# Altium PCB Solar Water Heater Controller.PcbDoc
Units mm, origin at the board's own origin, x right, y up, seen from the top; angles counter-clockwise.
Board outline 100 x 100.08 mm, 2 copper layers (Top Layer, Bottom Layer); 88 components, 59 nets, 278 pads, 93 vias.
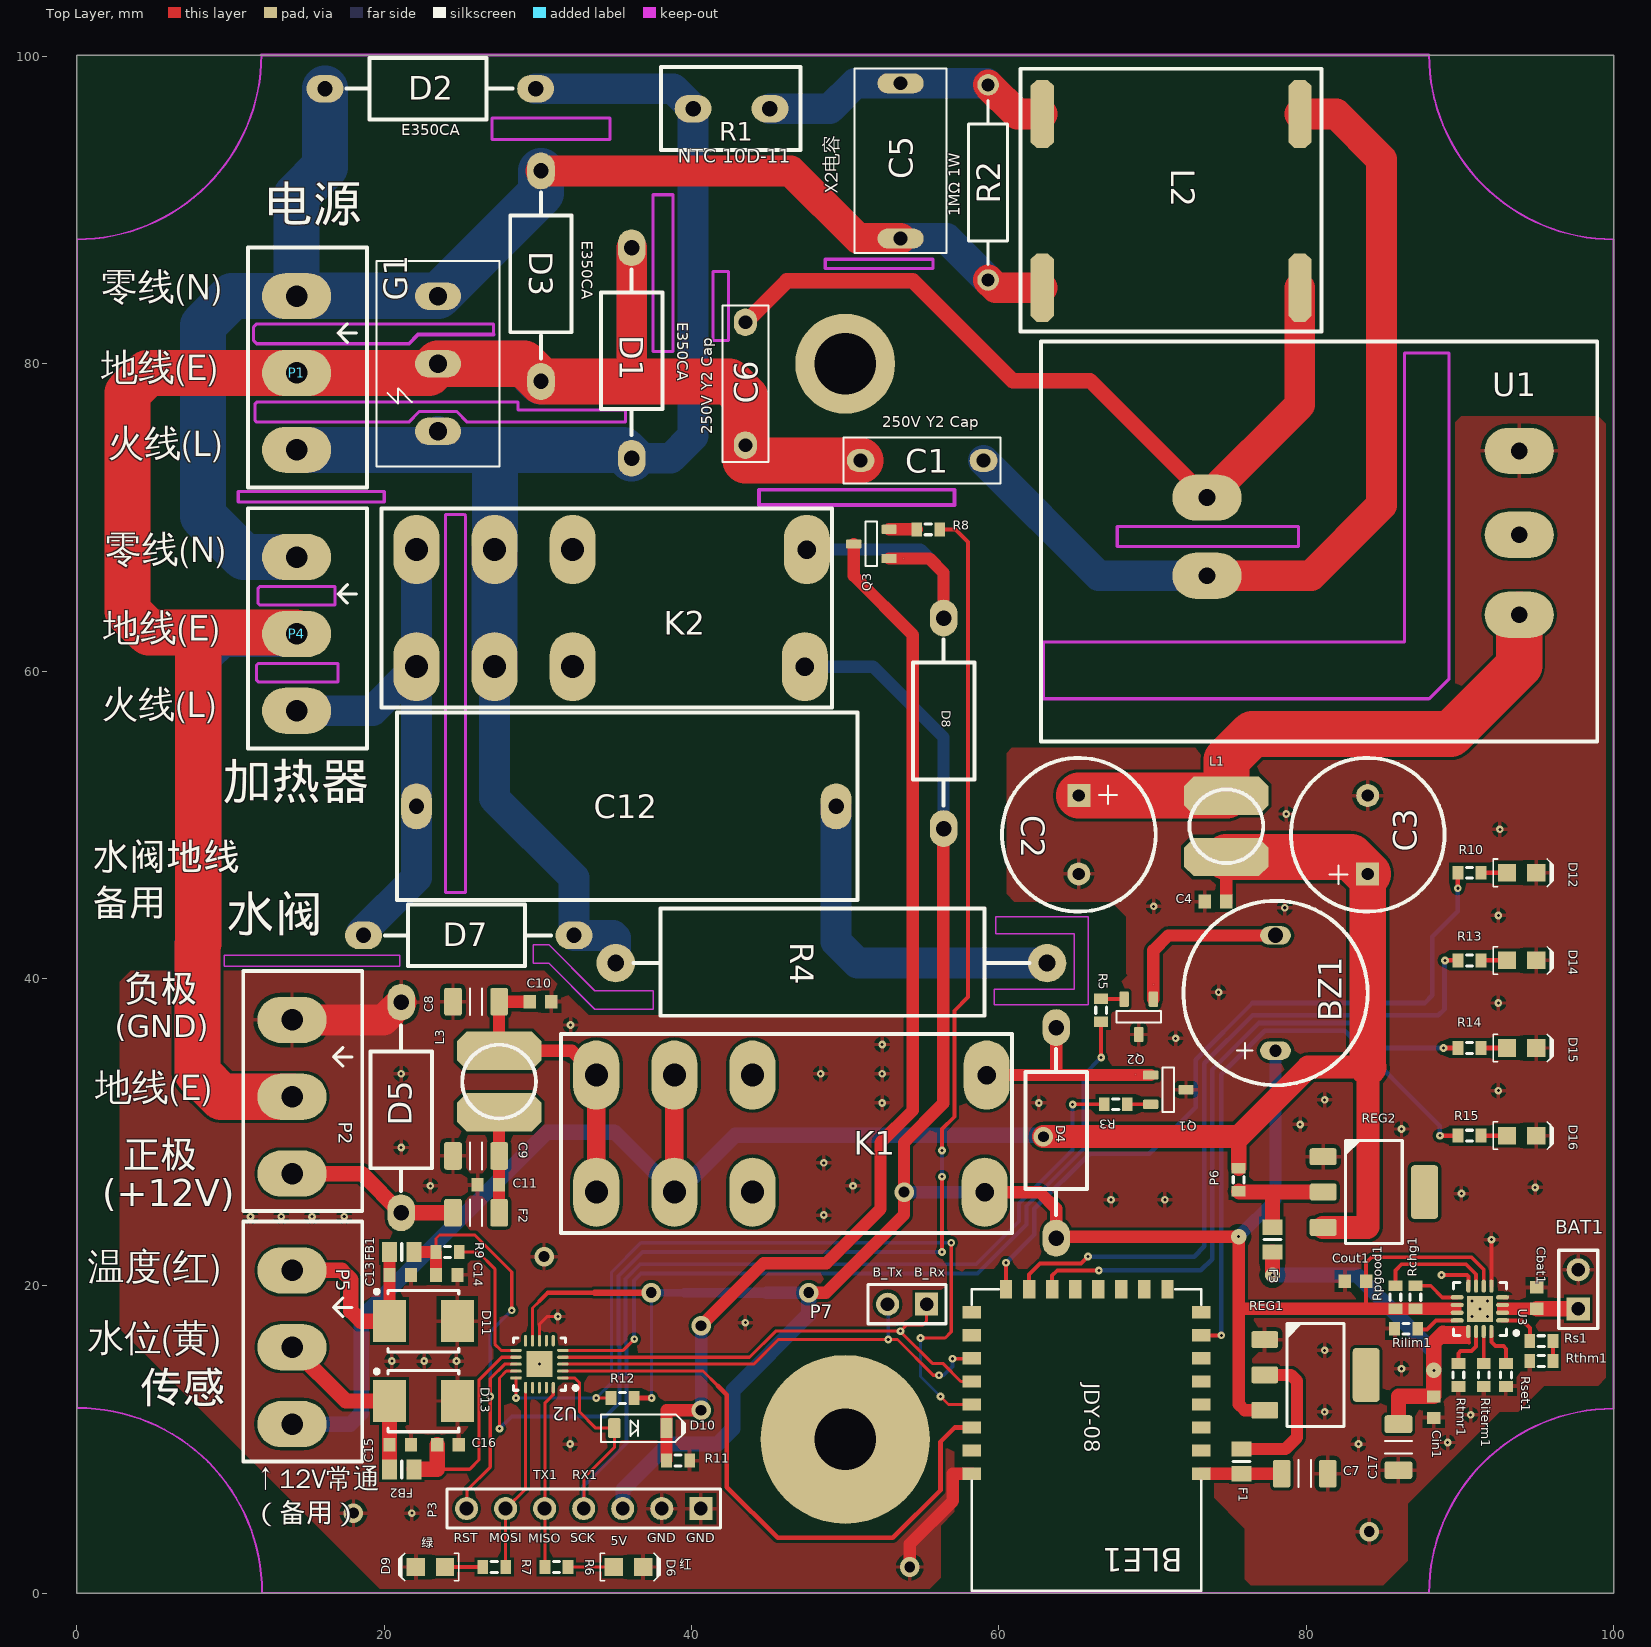
[diagram p0: Top Layer view]
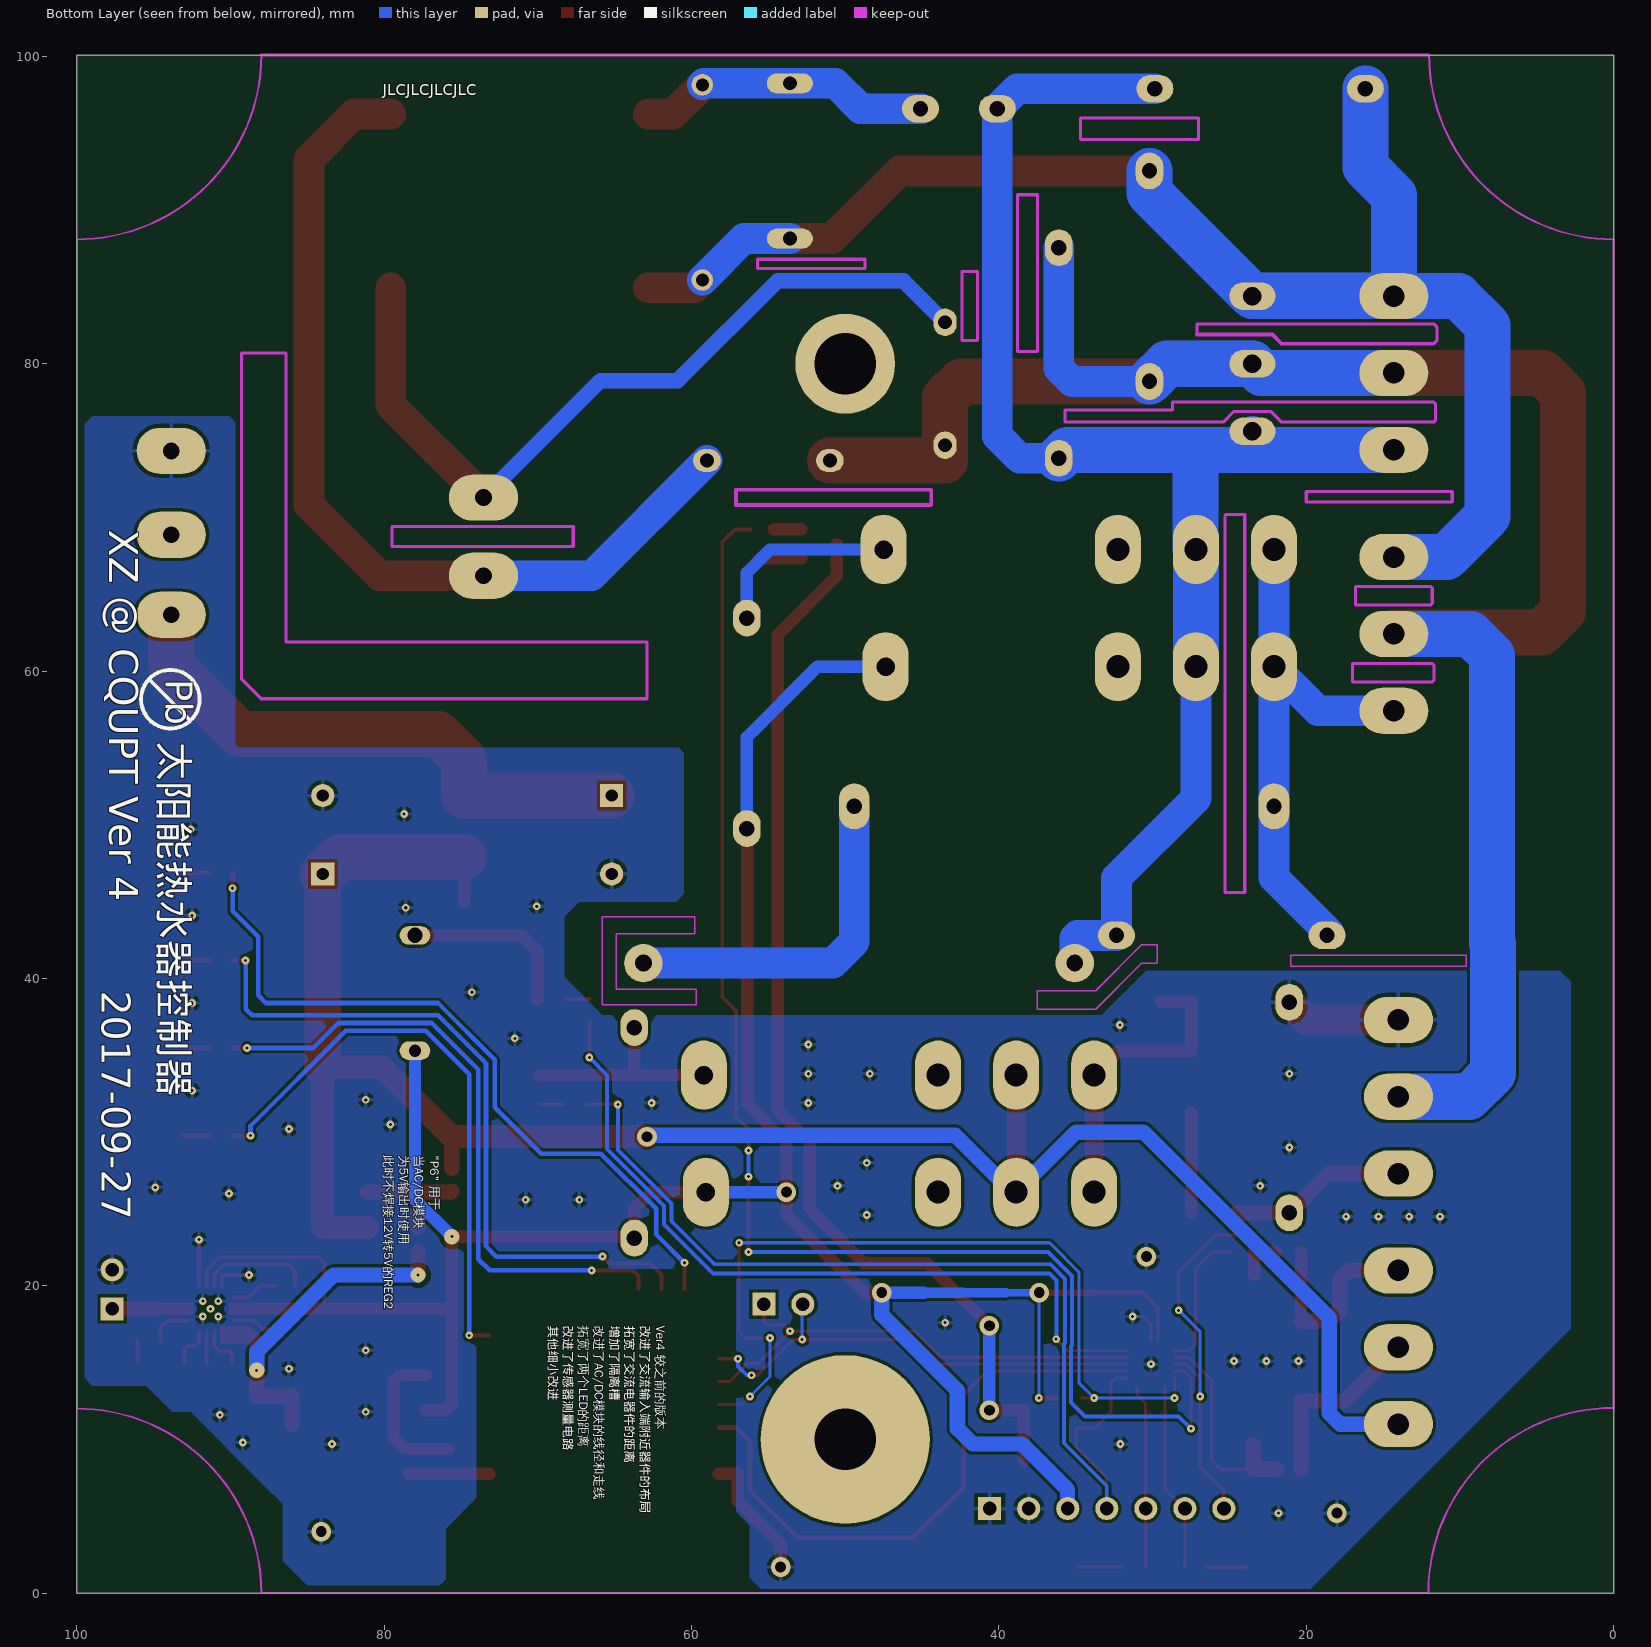
[diagram p1: Bottom Layer view, seen from below]

## Layer stack, top to bottom
Top Solder: solder mask 0.0102, Solder Resist, Dk 3.5
Top Layer: signal copper 0.0356
Dielectric 1: dielectric 0.32, FR-4, Dk 4.8
Bottom Layer: signal copper 0.0356
Bottom Solder: solder mask 0.0102, Solder Resist, Dk 3.5

## Board outline
0,0 100,0 100,100.076 0,100.076

## Design rules (kind name [scope] priority, off if disabled: settings)
Clearance Clearance_1 [All] p1: gap=0.2
Clearance 220V_N_2_GND [InNet('AC220V_N') vs InNet('GND')] p2: gap=0.2 except(1.5: Arc-Poly Track-Poly SMDPad-Poly THPad-Poly Via-Poly)
Clearance 220V_L_2_GND_1 [InNet('NetC12_1') vs InNet('GND')] p3: gap=0.2 except(1.5: Arc-Poly Track-Poly SMDPad-Poly THPad-Poly Via-Poly)
Clearance Earth2GND [InNet('ERTH') vs InNet('GND')] p4: gap=0.2 except(1.5: Track-Poly THPad-Poly)
Clearance [All] p5: gap=0.2
DiffPairsRouting [All] p1: maxlimit=0.254 minlimit=0.254 mostfreqgap=0.254 toplayer_minwidth=0.127 toplayer_maxwidth=0.381 toplayer_prefwidth=0.381 bottomlayer_minwidth=0.127 bottomlayer_maxwidth=0.381 bottomlayer_prefwidth=0.381 maxuncoupledlength=12.7
PolygonConnect [All] p1: connectstyle=Relief reliefconductorwidth=0.254 reliefentries=4 polygonreliefangle="90 Angle" airgapwidth=0.254
RoomDefinition "Solar Water Heater Controller" [InComponentClass('Solar Water Heater Controller')] p1 off: confinementstyle=ConfineIn formatcopy=TRUE lockcomponents=FALSE outline -25.4,-25.4 25.4,-25.4 25.4,0 -25.4,0
RoutingVias [All] p1: holewidth=0.711 width=1.27 viastyle="Through Hole" minholewidth=0.711 minwidth=1.27 maxholewidth=0.711 maxwidth=1.27
SolderMaskExpansion [All] p1: expansion=0.102
Width [All] p1: maxlimit=5 minlimit=0.2 preferedwidth=0.254 minimp=50.000000 maximp=50.000000 favimp=50.000000
29 further rules are at their usual default settings.

## Components (designator, comment, footprint, x,y, rotation, side; value= is the part's Value field where it differs from the comment)
BAT1 "Header 2" HDR1X2 97.7,18.5 r90 top
BLE1 "Bluetooth 4.0" JDY-08 65.7,13.775 r270 top
BZ1 "BUZZER" BUZZER 78,35.3 r90 top
C1 "250V Y2 cap" CAPY2 55,73.7 r0 top
C2 "Cap Pol 25V" CAP680UF 65.2,49.35 r270 top
C3 "Cap Pol 25V" CAP680UF 84,49.35 r90 top
C4 "Cap 50V" 1608[0603] 74.1,45 r0 top
C5 "275V X2 safe cap" CAPX2 53.6,93.2 r270 top
C6 "250V Y2 cap" CAPY2 43.5,78.7 r270 top
C7 "Tantalum Cap 16V" CAPC3216X175N 79.9,7.775 r0 top
C8 "Tantalum Cap 16V" CAPC3216X175N 25.975,38.485 r180 top
C9 "Tantalum Cap 16V" CAPC3216X175N 25.975,28.45 r180 top
C10 "Cap 50V" 1608[0603] 30.175,38.485 r180 top
C11 "Cap 50V" 1608[0603] 26.775,26.575 r0 top
C12 "polyester 1000V" "CBB21 CAPACITOR" 35.752,51.2 r180 top
C13 "Cap Semi" 1608[0603] 21.04,20.7 r0 top
C14 "Cap Semi" 1608[0603] 24.075,20.7 r0 top
C15 "Cap Semi" 1608[0603] 21.04,9.66 r0 top
C16 "Cap Semi" 1608[0603] 24.15,9.66 r0 top
C17 "Tantalum Cap 16V" CAPC3216X175N 86,9.5 r270 top
Cbat1 "GRM219C81A475KE34D" 1608[0603] 95,19.2 r90 top
Cin1 "GRM188R61A105KA61D" 1608[0603] 88.3,12.1 r270 top
Cout1 "GRM21BR61E475MA12L" 1608[0603] 83.2,20.3 r180 top
D1 "P6KE350CA" DO-15 36.1,80.7 r270 top
D2 "P6KE350CA" DO-15 23,97.9 r0 top
D3 "P6KE350CA" DO-15 30.2,85.7 r270 top
D4 "Diode FR207 1000V 70A" DO-15 63.725,29.95 r270 top
D5 "P6KE15A" DO-15 21.1,31.6 r90 top
D6 "LED1" LED_1420 35.9,1.7 r270 top
D7 "P6KE350CA" DO-15 25.5,42.8 r0 top
D8 "Diode FR207 1000V 70A" DO-15 56.4,56.6 r270 top
D9 "LED2" LED_1420 23,1.7 r90 top
D10 "LL60P" LL60P 36.675,10.735 r0 top
D11 "P6KE6.8A" ONSC-SMB-2-403A-03_H_V 22.55,17.7 r0 top
D12 "LEDW" LED_1420 94.018,46.873 r270 top
D13 "P6KE6.8A" ONSC-SMB-2-403A-03_H_V 22.55,12.5 r0 top
D14 "LEDW" LED_1420 94.018,41.173 r270 top
D15 "LEDW" LED_1420 94.018,35.473 r270 top
D16 "LEDW" LED_1420 94.018,29.773 r270 top
F1 "Fuse 1A" 6-0805_L 75.8,8.575 r270 top
F2 "Fuse 13.2V/0.5A" CAPC3216X100N 25.975,24.75 r0 top
F3 "Fuse 1A" 6-0805_L 77.8,23 r270 top
FB1 "FB" 6-0805_L 21.14,22.2 r0 top
FB2 "FB" 6-0805_L 21.14,8.06 r0 top
G1 "放电管" "GAS TUBE" 23.5,80 r90 top
K1 "5VRelay-AC-220V_15A" SZ-S105LM 46.5,29.9 r180 top
K2 "5VRelay-AC-220V_15A" SZ-S105LM 34.8,64.1 r180 top
L1 "LDM" CD54 74.8,49.9 r0 top
L2 "INDUCTOR LCM" "SUMIDA CPFC1709/MS" 71.2,90.6 r270 top
L3 "Inductor Iron Dot" CD54 27.475,33.285 r0 top
P1 "AC In" "3P 5.08MM CONNECTER" 14.3,79.4 r270 top
P2 "Valve Plug" "3P 5.08MM CONNECTER" 14,32.3 r270 top
P3 "Header 7" HDR1X7 40.6,5.5 r180 top
P4 "Heater Plug" "3P 5.08MM CONNECTER" 14.3,62.42 r270 top
P5 "Sens" "3P 5.08MM CONNECTER" 14,16 r270 top
P6 "PowerSelect" J1-0603#1 75.6,26.9 r270 top
P7 "Serial" HDR1X2 55.3,18.8 r180 top
Q1 "NPN" SOT23-3 71.025,32.76 r0 top
Q2 "NPN" SOT23-3 69.1,37.5 r270 top
Q3 "NPN" SOT23-3 51.7,68.275 r180 top
R1 "NTC 10D-11" "NTC 10D-11" 45.1,96.6 r180 top
R2 "1W" AXIAL-0.5 59.3,91.8 r90 top
R3 "0603" J1-0603#2 67.6,31.81 r180 top
R4 "cement 10W" "5W RESISTOR" 49.1,41 r0 top
R5 "0603" J1-0603#1 66.65,37.925 r270 top
R6 "0603" J1-0603#1 31.205,1.7 r0 top
R7 "0603" J1-0603#1 27.165,1.7 r180 top
R8 "0603" J1-0603#1 55.4,69.225 r0 top
R9 "0603" J1-0603#1 24.125,22.2 r180 top
R10 "0603" J1-0603#1 90.618,46.873 r0 top
R11 "0603" J1-0603#1 39.125,8.625 r180 top
R12 "0603" J1-0603#1 35.5,12.7 r0 top
R13 "0603" J1-0603#1 90.618,41.173 r0 top
R14 "0603" J1-0603#1 90.618,35.473 r0 top
R15 "0603" J1-0603#1 90.618,29.773 r0 top
Rchg1 "CRCW04021K50FKED" J1-0603#1 87.1,19.25 r90 top
REG1 "5V Regulator" SOT223 80.6,14.2 r0 top
REG2 "5V Regulator" SOT223 84.4,26.1 r0 top
Rilim1 "CRCW04023K09FKED" J1-0603#1 86.5,17.2 r180 top
Riterm1 "CRCW04021K43FKED" J1-0603#1 91.55,14.2 r270 top
Rpgood1 "CRCW04021K50FKED" J1-0603#1 85.8,19.25 r90 top
Rs1 "ERJ-2BSFR10X" J1-0603#1 95.3,16.4 r0 top
Rset1 "CRCW04021K74FKED" J1-0603#1 93,14.2 r270 top
Rthm1 "NCP15XH103E03RC" J1-0603#1 95.3,15.1 r0 top
Rtmr1 "CRCW040256K2FKED" J1-0603#1 89.9,14.2 r270 top
U1 "AC/DC Module" HB12N10-2836 83.7,69 r0 top
U2 "ATtiny441-MMHR" 20M2_N 30.1,14.9 r180 top
U3 "BQ24232RGTR" RGT16-1700X1700TP 91.3,18.5 r180 top

## Footprints (in the part's own frame and the unit in brackets; to place one, negate y for a bottom-side part, rotate by r counter-clockwise, add the part's x,y. Pads: shape width x height; smd on the part's side, far side on the other; paste and mask are expansions set on the pad)
"3P 5.08MM CONNECTER" [mm]
  oval 3x4.5 hole 1.4: 1(-5,0) 2(0,0) 3(5,0)
  silkscreen extent -8.18,-3.18 7.45,4.57, body extent -8.05,-3.05 7.32,4.45, height 7
"5W RESISTOR" [mm]
  round 2.5 hole 1.1: 1(-14.034,0) 2(14.034,0)
  silkscreen extent -12.89,-3.43 12.89,3.56, body extent -10.99,-3.3 9.84,3.43, height 7
6-0805_L [mm] "Chip Resistor, Body 2.0x1.2mm, IPC High Density"
  rect 1x1.3 smd: 1(-0.8,0) 2(0.8,0)
  silkscreen extent 0,-0.55 0,0.55, body extent -1.07,-0.7 1.07,0.7, height 0.7
20M2_N [mm] "QFN, 20-Leads, Body 3x3mm, Pitch 0.45mm, Thermal Pad 1.7x1.7mm, IPC Medium Density"
  oval 0.75x0.2 smd: 1(-1.525,0.9) 2(-1.525,0.45) 3(-1.525,0) 4(-1.525,-0.45) 5(-1.525,-0.9) 11(1.525,-0.9) 12(1.525,-0.45) 13(1.525,0) 14(1.525,0.45) 15(1.525,0.9)
  oval 0.2x0.75 smd: 6(-0.9,-1.525) 7(-0.45,-1.525) 8(0,-1.525) 9(0.45,-1.525) 10(0.9,-1.525) 16(0.9,1.525) 17(0.45,1.525) 18(0,1.525) 19(-0.45,1.525) 20(-0.9,1.525)
  rect 1.7x1.7 smd: 21(0,0)
  silkscreen extent -2.47,-1.7 1.7,1.7, body extent -1.55,-1.55 1.55,1.55, height 0.85
1608[0603] [mm] "Chip Capacitor, Body 1.6x0.8mm, IPC High Density"
  rect 0.8x0.9 smd: 1(-0.7,0) 2(0.7,0)
  body extent -0.87,-0.48 0.87,0.48, height 1.3
AXIAL-0.5 [mm] "Axial Device, Thru-Hole; 2 Leads; 0.5 in Pin Spacing"
  round 1.4 hole 0.85: 1(-6.35,0) 2(6.35,0)
  silkscreen extent -5.33,-1.27 5.33,1.27
BUZZER [mm]
  oval 1.2x2 hole 0.8: 1(0,0)
  oval 1.2x2 hole 1: 2(7.5,0)
  silkscreen extent -2.25,-6 9.75,6
CAP680UF [mm] "680uF 25V"
  rect 1.5x1.5 hole 0.8: 1(-2.55,0)
  round 1.5 hole 0.8: 2(2.55,0)
  silkscreen extent -5,-5 5,5
CAPC3216X100N [mm] "Chip Capacitor, Body 3.2x1.6mm, 1.0mm H, EIA 1206, IPC Medium Density"
  round 0.508 on Mech15: 0(0,0)
  rrect25% 1.15x1.8 smd: 1(-1.5,0) 2(1.5,0)
  silkscreen extent -0.4,-0.88 0.4,0.88, body extent -1.7,-0.9 1.7,0.9, height 1
CAPC3216X175N [mm] "Chip Capacitor, Body 3.2x1.6mm, 1.75mm H, EIA 1206, IPC Medium Density"
  round 0.508 on Mech15: 0(0,0)
  rrect25% 1.15x1.8 smd: 1(-1.5,0) 2(1.5,0)
  silkscreen extent -0.4,-0.88 0.4,0.88, body extent -1.7,-0.9 1.7,0.9, height 1.75
CAPX2 [mm]
  oval 1.3x3 hole 0.9: 1(-5.05,0) 2(5.05,0)
  silkscreen extent -6,-3 6,3, body extent -6,-3 6,3, height 12
CAPY2 [mm]
  oval 1.8x1.5 hole 0.9: 1(-4,0) 2(4,0)
  silkscreen extent -5.1,-1.5 5.1,1.5
"CBB21 CAPACITOR" [mm] "105J/1000V 1UF 5%"
  oval 2x3 hole 1: 1(-13.652,0) 2(13.652,0)
  silkscreen extent -15.05,-6.1 14.92,6.1, body extent -14.92,-5.97 14.8,5.97, height 20.6
CD54 [mm]
  oct 5.5x2.5 smd: 1(0,2) 2(0,-2)
  silkscreen extent -2.4,-2.4 2.4,2.4
DO-15 [mm] "TVS Tube"
  oval 2.4x1.8 hole 1: 1(-6.85,0) 2(6.85,0)
  silkscreen extent -5.45,-2 5.35,2
"GAS TUBE" [mm]
  oval 1.8x3 hole 1.2: 1(-4.4,0) 2(0,0) 3(4.4,0)
  silkscreen extent -6.7,-4 6.7,4
HB12N10-2836 [mm] "220V AC to 12VDC 1A"
  oval 4.5x3 hole 1.1: 1(-10.16,-2.794) 2(-10.16,2.286) 3(10.16,-5.334) 4(10.16,-0.127) 5(10.16,5.334)
  silkscreen extent -20.95,-13.59 15.24,12.45, body extent -21.08,-13.59 15.11,12.45, height 16
HDR1X2 [mm] "Connector; Header; 2 Position"
  rect 1.5x1.5 hole 0.9: 1(0,0)
  round 1.5 hole 0.9: 2(2.54,0)
  silkscreen extent -1.27,-1.27 3.81,1.27
HDR1X7 [mm] "Connector; Header; 7 Position"
  rect 1.5x1.5 hole 0.9: 1(0,0)
  round 1.5 hole 0.9: 2(2.54,0) 3(5.08,0) 4(7.62,0) 5(10.16,0) 6(12.7,0) 7(15.24,0)
  silkscreen extent -1.27,-1.27 16.51,1.27
J1-0603#1 [mm] "Chip Resistor, Body 1.6x0.8mm, IPC High Density"
  rect 0.7x0.9 smd: 1(-0.75,0) 2(0.75,0)
  silkscreen extent -0.2,-0.35 0.2,0.35, body extent -0.85,-0.48 0.85,0.48, height 0.9
J1-0603#2 [mm] "Chip Resistor, Body 1.6x0.8mm, IPC High Density"
  rect 0.7x0.9 smd: 1(-0.75,0)
  rect 0.7x0.9 smd paste+0: 2(0.75,0)
  silkscreen extent -0.2,-0.35 0.2,0.35, body extent -0.85,-0.48 0.85,0.48, height 0.9
JDY-08 [mm]
  rect 0.8x1.2 smd: 1(6,7.468) 2(4.5,7.468) 3(3,7.468) 4(1.5,7.468) 5(0,7.468) 6(-1.5,7.468) 7(-3,7.468) 8(-4.5,7.468) 17(-4.5,-7.468) 18(-3,-7.468) 19(-1.5,-7.468) 20(0,-7.468) 21(1.5,-7.468) 22(3,-7.468) 23(4.5,-7.468) 24(6,-7.468)
  rect 1.2x0.8 smd: 9(-6,5.265) 10(-6,3.765) 11(-6,2.265) 12(-6,0.765) 13(-6,-0.735) 14(-6,-2.235) 15(-6,-3.735) 16(-6,-5.235)
  silkscreen extent -6,-7.47 13.61,7.47, body extent -5.94,-7.39 13.49,7.34, height 7
LED_1420 [mm] "LED used in 1420"
  rect 1.14x1.2 smd: 1(0,-0.955) 2(0,0.955)
  silkscreen extent -0.9,-1.84 0.9,2.06
LL60P [mm] "1N60P"
  rrect25% 0.8x1.3 smd: 1(-1.7,0) 2(1.7,0)
  Top Layer pour cut-out: -1.708,0.716 1.7,0.716 1.7,-0.8 -1.708,-0.8
  silkscreen extent -2.56,-0.9 2.9,0.9, body extent -2,-0.8 2.05,0.7, height 0.8
"NTC 10D-11" [mm] "NTC 10D-11"
  oval 2.4x1.8 hole 1: 1(0,0) 2(5,0)
  silkscreen extent -2,-2.7 7.1,2.7
ONSC-SMB-2-403A-03_H_V [mm] "Molded, 2-Leads, Body 4.6x3.95mm"
  rect 2.159x2.743 smd: 1(-2.21,0) 2(2.21,0)
  silkscreen extent -3.16,-2 2.3,2.05, body extent -2.3,-1.97 2.3,1.97, height 2.42
RGT16-1700X1700TP [mm] "QFN, 16-Leads, Body 3x3mm, Pitch 0.5mm, Thermal Pad 1.7x1.7mm, TI Recommended"
  oval 0.85x0.28 smd paste-0.025 mask+0.07: 1(-1.475,0.75) 2(-1.475,0.25) 3(-1.475,-0.25) 4(-1.475,-0.75) 9(1.475,-0.75) 10(1.475,-0.25) 11(1.475,0.25) 12(1.475,0.75)
  oval 0.28x0.85 smd paste-0.025 mask+0.07: 5(-0.75,-1.475) 6(-0.25,-1.475) 7(0.25,-1.475) 8(0.75,-1.475) 13(0.75,1.475) 14(0.25,1.475) 15(-0.25,1.475) 16(-0.75,1.475)
  rect 1.7x1.7 smd paste-0.85 mask+0.07: 17(0,0)
  silkscreen extent -2.5,-1.73 1.73,1.73, body extent -1.57,-1.57 1.58,1.58, height 1
SOT23-3 [mm] "SOT23, 3 pin"
  round 0.5 on Mech15: 0(0,0)
  rrect25% 1x0.6 smd: 1(-1.15,0.95) 2(-1.15,-0.95) 3(1.15,0)
  silkscreen extent -0.38,-1.45 0.38,1.45, body extent -1.4,-1.45 1.4,1.45, height 1.29
SOT223 [mm] "SOT223 /SC-73"
  round 1 on Mech15: 0(0,0)
  rrect25% 1.75x1.1 smd: 1(-3.3,2.3) 2(-3.3,0) 3(-3.3,-2.3)
  rrect25% 1.75x3.5 smd: 4(3.3,0)
  silkscreen extent -1.85,-3.35 1.85,3.35, body extent -3.65,-3.35 3.65,3.35, height 1.8
"SUMIDA CPFC1709/MS" [mm]
  oct 4.45x1.5 smd: 1(-5.65,-8.38) 2(5.65,-8.38) 3(5.65,8.38) 4(-5.65,8.38)
  silkscreen extent -8.6,-9.8 8.5,9.8, body extent -8.7,-9.9 8.6,10, height 9.91
SZ-S105LM [mm] "5V control 250V AC 16A"
  oval 3x4.5 hole 1.5: 1(7.62,-3.81) 1(7.62,3.81) 2(12.7,-3.81) 2(12.7,3.81) 5(2.54,3.81) 5(2.54,-3.81)
  oval 3x4.5 hole 1.2: 3(-12.573,3.81) 4(-12.7,-3.81)
  silkscreen extent -14.35,-6.48 14.99,6.48, body extent -14.22,-6.35 14.86,6.35, height 20.6

## Part data
BAT1: "Header, 2-Pin"
BLE1: library part CC2541-Small
BZ1: "5V有源蜂鸣器 电磁式 SOT塑封管 5V 12mm"
C1 C6: library part "Cap Semi", "JNC222M 250V"
C2 C3: library part "Cap Pol1", "Polarized Capacitor (Radial)"
C4 C10 C11 C12: library part "Cap Semi", "Capacitor (Semiconductor SIM Model)"
C5: library part "Cap Semi", "MPX104KV 275V X2安规电容"
C7 C17: library part "Cap Pol3", "22UF 16V 226K A3216 1206"
C8 C9: library part "Cap Pol3"
C13 C14 C15 C16: "Capacitor (Semiconductor SIM Model)"
Cbat1: "GRM219C81A475KE3"
Cin1: "GRM188R61A105KA6"
Cout1: "GRM21BR61E475MA1"
D1 D2 D3 D7: library part "Diode TVS"
D4 D8: library part "Diode 1N914", "High Conductance Fast Diode"
D5 D11: library part "Diode TVS_S"
D6 D12 D14 D15 D16: library part LED2, "Typical RED, GREEN, YELLOW, AMBER GaAs LED"
D9: "Typical RED, GREEN, YELLOW, AMBER GaAs LED"
D10: library part "Diode 1N914"
D13: library part "Diode TVS_S", "P6KE6.8A SMB"
F1 F3: library part "Fuse 2", "Fuse 1000mA 6V"
F2: library part "Fuse 2", "1206SMD 500mA 13.2V/0.5A"
FB1 FB2: library part Res2, "磁珠"
G1: library part GOT, "3RM230L-8 230V"
K1 K2: library part Relay-SPST, "Single-Pole Single-Throw Relay SZ-S-105LM"
L1: library part "INDUCTOR IRON", "4R7H 贴片电感"
L3: "贴片 CD54 100uH"
P1 P2 P4 P5: library part "Header 3", "Header, 3-Pin"
P3: "Header, 7-Pin"
P6 P7: library part "Header 2", "Header, 2-Pin"
Q1 Q2 Q3: "NPN Bipolar Transistor"
R1 R2: library part "Res Semi", "Semiconductor Resistor"
R3 R4 R5 R6 R7 R8 R9 R10 R11 R12 R13 R14 R15: library part Res3, "Resistor"
REG1 REG2: library part AMS1117
U1: library part "AC/DC Moule", "AC/DC Module 220V AC / 12V DC 1A"
U2: library part ATtiny44A-MMHR, "8-bit AVR Microcontroller,  20MHz, 1.8-5.5V, 4KB Flash, 256 Bytes EEPROM, 256 Bytes SRAM, 20-pin VQFN, Industrial Grade (-40癈 to 85癈), Pb-Free, Reel"

## Free pads (board coordinates)
  round 11 hole 4: ""(50,10)
  round 6.5 hole 4: ""(50,80)

## Via types
v1: diameter 0.5, hole 0.2, Top Layer to Bottom Layer, 75 vias
v2: diameter 1.27, hole 0.711, Top Layer to Bottom Layer, 10 vias
v3: diameter 0.5, hole 0.2, Top Layer to Bottom Layer, tented top, 5 vias
v4: diameter 1, hole 0.2, Top Layer to Bottom Layer, 3 vias

## Nets (pads, with @x,y where several pads share a name; then routed paths per layer and width w, separated by ;. In a path a pad name is that pad's centre, name@x,y a point inside that pad or via, vN(x,y) a via of type N, cw(c..) or ccw(c..) an arc to the next point about the centre after c; other vN are vias at no path point)
+3V3: BLE1.1 C7.1 F1.2 | length 5.3
  Top Layer w0.8: BLE1.1@73.168,7.734 BLE1.1 F1.2 C7.1
+5: BZ1.1 Cout1.1 D4.2 D8.2 K1.3 K2.3 P3.3 R12.2 Rchg1.1 REG1.3 Rpgood1.1 U2.9 U3.6 U3.10 U3.11 | length 176
  Top Layer w0.2: U2.9 29.65,18.55 30.1,19
  Top Layer w0.254: 30.1,19 30.65,19.55 ; 83.9,18.5 Cout1.1 83.9,21.5 84.254,21.854 90.746,21.854 91.55,21.05 U3.6
  Top Layer w0.3: 30.65,19.55 33.7,19.55 ; R12.2 v1(37.4,12.7)
  Top Layer w0.4: 33.7,19.55 v2(37.375,19.55)
  Top Layer w0.8: v2@47.725,19.55 48.75,19.55 53.825,24.625 v2(53.825,26.09) 53.825,29.309 56.373,31.857 56.373,49.75 D8.2 ; K1.3 62.66,26.09 63.725,25.025 D4.2@63.725,23.15 ; D4.2@63.775,23.2 v4(75.6,23.2) 75.6,18.5 ; REG1.3 76,11.9 75.6,12.3 75.6,18.5 ; 88.6,18.5 Rchg1.1 Rpgood1.1 83.9,18.5 75.6,18.5
  Top Layer w1: D4.2@63.725,23.15 D4.2@63.775,23.2
  Bottom Layer w0.2: v1(37.4,12.7) v2@37.4,19.525
  Bottom Layer w0.3: v2(37.375,19.55) v2@37.4,19.525
  Bottom Layer w0.5: v2(37.375,19.55) 39.525,19.55
  Bottom Layer w0.6: 39.525,19.55 42.3,19.55
  Bottom Layer w0.7: 42.3,19.55 44.875,19.55
  Bottom Layer w0.8: 44.875,19.55 v2(47.625,19.55) v2@47.725,19.55 ; K2.3 51.81,60.29 56.4,55.7 D8.2 ; v2(53.825,26.09) K1.3 ; v4(75.6,23.2) 78,25.6 BZ1.1
  Bottom Layer w1: P3.3@35.535,5.5 35.535,6.735 38.5,9.7 41.7,9.7 42.7,10.7 42.7,13.2 47.625,18.125 v2(47.625,19.55)
+12: C3.1 C4.2 K1.1 L1.2 P5.3 P6.1 REG2.3 | length 134.7
  Top Layer w0.8: C4.2 L1.2
  Top Layer w1: P6.1 75.6,29.7
  Top Layer w1.2: K1.1@38.88,26.09 K1.1@38.88,33.71
  Top Layer w1.5: v2(62.9,29.7) 75.6,29.7 80.125,34.225 84.025,34.225 84.025,23.825 ; REG2.3 84,23.8
  Top Layer w2.4: C3.1 84,34.25 84.025,34.225
  Top Layer w3: L1.2 82.9,47.9 C3.1
  Bottom Layer w0.8: K1.1@38.88,26.09 K1.1@39.14,26.09
  Bottom Layer w1: P5.3 17.8,11 18.5,11.7 18.5,17.9 30.6,30 34.97,30 K1.1@38.88,26.09 ; K1.1@39.14,26.09 42.85,29.8 62.8,29.8 v2(62.9,29.7)
AC220V_L: D1.2 D2.2 D7.2 G1.1 K2.1 P1.3 R1.2 R4.1 | length 98.1
  Bottom Layer w2: 23.5,74.4 G1.1 ; K2.1@27.18,60.29 27.18,51.72 32.35,46.55 D7.2 34.9,42.8 35.067,42.633 R4.1 ; D2.2 38.8,97.9 R1.2 40.1,75.3 38.65,73.85 D1.2
  Bottom Layer w3: P1.3 23.5,74.4 27.2,74.4 ; K2.1@27.18,60.29 27.18,67.91 27.2,67.93 27.2,74.4 ; D1.2 35.55,74.4 27.2,74.4
AC220V_N: C5.2 D2.1 D3.1 G1.3 L2.2 P1.1 P4.1 R2.1 | length 96.7
  Top Layer w2: D3.1 46.45,92.55 50.85,88.15 C5.2 ; R2.1 59.8,84.95 L2.2
  Bottom Layer w2: C5.2 56.6,88.15 R2.1
  Bottom Layer w3: P4.1 10.88,67.42 8.2,70.1 8.2,82.5 10.1,84.4 P1.1 P1.1@14.3,84.427 ; D2.1 16.15,92.8 14.3,90.95 P1.1@14.3,84.427 ; G1.3 30.2,91.1 D3.1 ; G1.3@23.5,84.427 P1.1@14.3,84.427
ARD_MISO/LED1: P3.5 R6.1 U2.20 | length 11.9
  Top Layer w0.2: R6.1 30.455,12.355 31,12.9 U2.20
ARD_MOSI/LED2: P3.6 R7.1 U2.16 | length 12.2
  Top Layer w0.2: R7.1@27.9,1.715 P3.6 ; P3.6@27.915,5.485 29.2,6.77 U2.16
ARD_RST/SENS_ADC: C14.1 FB1.2 P3.7 R9.2 U2.13 | length 29.7
  Top Layer w0.2: R9.2 23.375,23.075 23.6,23.3 25.9,23.3 28.3,20.9 v1(28.3,18.4) ; P3.7@25.375,5.5 25.375,6.675 26.9,8.2 v1(26.9,12.8) 26.9,13.966 27.834,14.9 U2.13
  Top Layer w0.8: FB1.2 R9.2 C14.1
  Bottom Layer w0.2: v1(26.9,12.8) 26.9,17 v1(28.3,18.4)
ARD_SCK/PUMP: D10.1 P3.4 R3.2 U2.1 | length 66.2
  Top Layer w0.2: U2.1 32.4,14 32.706,13.694 32.706,11.794 33.765,10.735 D10.1 34.975,9.475 33,7.5 P3.4@33,5.5
  Top Layer w0.254: v1(64.8,31.8) R3.2
  Bottom Layer w0.254: P3.4 32.98,6.98 35.754,9.754 35.754,16.23 35.698,16.286 35.698,20.452 36.646,21.4 58.5,21.4 61.3,24.2 61.3,25.342 64.8,28.842 v1(64.8,31.8)
ARD_VOLTSENS: BLE1.21 R12.1 U2.15 | length 53.4
  Top Layer w0.2: v1(28.575,12.7) U2.15 ; v1(33.8,12.7) R12.1@34.65,12.7 ; v1(54.9,16.6) 56.5,16.6 56.9,17 v1(56.9,22.8) ; v1(56.2,12.8) 56.725,12.275 BLE1.21
  Bottom Layer w0.2: v1(28.575,12.7) v1(33.8,12.7) 34.8,13.7 34.8,20.9 36.7,22.8 v1(56.9,22.8) ; v1(54.9,16.6) 54.9,14.1 v1(56.2,12.8)
BLE_RXD: BLE1.20 P7.1 U2.4 | length 31.8
  Top Layer w0.2: U2.4 43.775,15.35 45.475,17.05 v1(53.6,17.05) ; P7.1 55.3,17.7 55.059,17.459 54.009,17.459 v1(53.6,17.05) ; BLE1.20 57.525,13.775 56.35,14.95 55.668,14.95 53.6,17.018 v1(53.6,17.05)
BLE_TXD: BLE1.19 P7.2 U2.3 | length 31.3
  Top Layer w0.2: U2.3 44.043,14.9 45.643,16.5 v1(52.8,16.5) 53.4,16.5 55.724,14.176 v1(56.103,14.176)
  Top Layer w0.254: v1(56.975,15.25) 58.207,15.25 BLE1.19
  Bottom Layer w0.2: P7.2 52.8,18.76 v1(52.8,16.5)
  Bottom Layer w0.254: v1(56.103,14.176) 56.401,14.176 56.975,14.75 v1(56.975,15.25)
BLT_PWRC: BLE1.22 U2.2 | length 39.4
  Top Layer w0.2: U2.2 40.75,14.45 41.7,13.5
  Top Layer w0.3: 41.7,13.5 42.3,12.9 42.3,6.9 45.6,3.6 53.1,3.6 56.2,6.7 56.2,9.846 57.129,10.775 BLE1.22
BUZZER: R5.2 U2.5 | length 51
  Top Layer w0.2: U2.5 35.55,15.8 v1(36.275,16.525)
  Top Layer w0.254: v1(66.65,34.85) R5.2
  Bottom Layer w0.254: v1(36.275,16.525) 36.25,16.55 36.25,20.35 36.7,20.8 58.6,20.8 61.8,24 61.8,25.2 65.5,28.9 65.5,33.7 v1(66.65,34.85)
ERTH: C1.1 C6.2 D1.1 D3.2 G1.2 P1.2 P2.2 P4.2 | length 195.2
  Top Layer w2: 36.1,78.85 D1.1
  Top Layer w2.5: P4.2@14.22,62.5 P4.2
  Top Layer w3: P2.2 9.4,32.3 7.85,33.85 7.85,42.225 7.9,42.275 7.9,62.5 ; P4.2@14.22,62.5 7.9,62.5 ; C1.1 43.5,73.7 43.5,77.8 42.45,78.85 36.1,78.85 30.25,78.85 29.1,80 G1.2 22.9,79.4 P1.2 4.6,79.4 3.3,78.1 3.3,63.9 4.7,62.5 7.9,62.5
  Bottom Layer w2: D3.2 35.25,78.85 36.1,79.7 D1.1
  Bottom Layer w3: P2.2 9.4,32.3 7.85,33.85 7.85,42.275 7.9,42.325 7.9,61 9.32,62.42 P4.2 ; P1.2 22.9,79.4 G1.2 29.05,80 D3.2
GND: BAT1.2 BLE1.24 C2.2 C3.2 C4.1 C7.2 C8.2 C9.2 C10.1 C11.1 C13.2 C14.2 C15.2 C16.2 C17.2 Cbat1.2 Cin1.2 Cout1.2 D5.2 D6.2 D9.2 D11.2 D12.2 D13.2 D14.2 D15.2 D16.2 P2.1 P3.1 P3.2 Q1.3 Q2.3 R11.1 REG1.1 REG2.1 Rilim1.2 Riterm1.2 Rset1.2 Rthm1.1 Rtmr1.2 U1.5 U2.8 U2.21 U3.4 U3.5 U3.8 U3.17 | length 24
  Top Layer w0.2: U2.8 30.1,17.5 30.6,18 v1(31.3,18)
  Top Layer w0.254: v1(88.8,20.7) 90.458,20.7 90.55,20.608 U3.8 ; U3.5 v1(92.05,23)
  Top Layer w0.8: v2(54.2,1.7) 54.2,3.2 57.002,6.002 57.002,7.775 BLE1.24
  Top Layer w2: P2.1 19.95,37.3 D5.2
  other v1: 21.8,5.2 32.1,9.7 83.4,9.7 89.2,9.8 90.7,11.6 81.2,11.8 86.2,14.6 30.1,14.9 20.5,15.1 22.6,15.1 24.7,15.1 81.2,15.8 43.5,17.6 11.3,24.5 13.3,24.5 15.3,24.5 17.4,24.5 48.6,24.6 67.3,25.6 70.8,25.6 90.1,26 94.9,26.4 23,26.5 50.5,26.5 48.6,28 21.1,29 86.2,30.2 79.6,30.5 52.4,31.9 62.6,31.9 81.2,32.1 92.5,32.7 21.1,33.8 48.4,33.8 52.4,33.8 52.4,35.7 71.5,36.1 32.127,36.973 92.5,38.4 74.3,39.1 92.5,44.1 78.6,44.6 70.073,44.689 92.6,49.7 78.7,50.7
  other v2: 84.1,4 18,5.2 30.4,21.9
  other v3: 90.8,18 91.8,18 91.3,18.5 90.8,19 91.8,19
HEATER_L: C12.2 D7.1 K2.2 P4.3 | length 35.4
  Bottom Layer w2: P4.3 19.23,57.42 K2.2@22.047,60.237 ; D7.1@18.5,42.95 22.1,46.55 22.1,60.29 K2.2@22.1,67.91
LED_WTR1: BLE1.7 R15.1 | length 38.1
  Top Layer w0.254: BLE1.7 v1(74.475,16.775)
  Top Layer w0.3: v1(88.7,29.773) R15.1
  Bottom Layer w0.3: v1(74.475,16.775) 74.475,33.775 77.3,36.6 82.5,36.6 88.7,30.4 v1(88.7,29.773)
LED_WTR2: BLE1.14 R14.1 | length 42
  Top Layer w0.254: BLE1.14 63.465,20.665 63.8,21 v1(66.5,21)
  Top Layer w0.3: v1(88.927,35.473) R14.1
  Bottom Layer w0.3: v1(66.5,21) 73.144,21 73.875,21.731 73.875,34.075 76.9,37.1 83,37.1 84.627,35.473 v1(88.927,35.473)
LED_WTR3: BLE1.15 R13.1 | length 46.1
  Top Layer w0.254: BLE1.15 61.965,20.735 62.685,21.454 65.354,21.454 v1(65.8,21.9)
  Top Layer w0.3: v1(89.027,41.173) R13.1
  Bottom Layer w0.3: v1(65.8,21.9) 72.7,21.9 73.375,22.575 73.375,34.475 76.5,37.6 88.6,37.6 89,38 89,41.146 v1(89.027,41.173)
LED_WTR4: BLE1.16 R10.1 | length 48.1
  Top Layer w0.254: BLE1.16 v1@60.465,21.5
  Top Layer w0.3: v1(89.868,45.868) R10.1
  Bottom Layer w0.3: v1(60.465,21.5) 62.3,23.335 62.3,25 65.9,28.6 69.786,28.6 72.8,31.614 72.8,34.7 76.5,38.4 87.7,38.4 88.2,38.9 88.2,42.7 89.868,44.368 v1(89.868,45.868)
MOTOR_12V: D5.1 F2.1 P2.3 | length 11.5
  Top Layer w1: P2.3 18.55,27.3 D5.1 F2.1
NetBAT1_1: BAT1.1 Cbat1.1 U3.2 U3.3 | length 2.7
  Top Layer w1: Cbat1.1 BAT1.1
NetBZ1_2: BZ1.2 Q2.1 | length 11.5
  Top Layer w0.8: Q2.1 70.05,41.825 71.025,42.8 BZ1.2
NetC1_2: C1.2 L2.4 U1.1 | length 59.9
  Top Layer w2: U1.1 80.306,66.206 84.9,70.8 84.9,93.3 81.95,96.25 L2.4
  Bottom Layer w2: C1.2 66.494,66.206 U1.1
NetC2_1: C2.1 L1.1 U1.3 | length 36.8
  Top Layer w3: C2.1 L1.1 74.8,54.209 76.491,55.9 89.4,55.9 93.86,60.36 U1.3
NetC5_1: C5.1 L2.1 R1.1 R2.2 | length 19.2
  Top Layer w2: R2.2 61.2,96.25 L2.1
  Bottom Layer w2: R1.1 49,96.6 50.65,98.25 C5.1 59.2,98.25 R2.2
NetC6_1: C6.1 L2.3 U1.2 | length 90.2
  Top Layer w1: C6.1 46.2,85.4 54.4,85.4 60.9,78.9 65.926,78.9 U1.2
  Top Layer w2: U1.2 79.58,77.326 L2.3
  Bottom Layer w1: C6.1 46.2,85.4 54.4,85.4 60.9,78.9 65.926,78.9 U1.2
NetC8_1: C8.1 C10.2 K1.2 L3.1 | length 19.8
  Top Layer w0.8: C10.2 C8.1 L3.1 32.225,35.285 K1.2@33.8,33.71
  Top Layer w1.2: K1.2@33.8,26.09 K1.2@33.8,33.71
NetC9_1: C9.1 C11.2 F2.2 L3.2 | length 6.5
  Top Layer w0.8: F2.2 C11.2 C9.1 L3.2
NetC12_1: C12.1 R4.2 | length 23.1
  Bottom Layer w2: C12.1 49.405,42.395 50.8,41 R4.2
NetC13_1: C13.1 D11.1 FB1.1 P5.1 | length 13.4
  Top Layer w0.8: D11.1 C13.1 FB1.1
  Top Layer w1: P5.1 17.225,21 17.825,20.4 17.825,18.35 18.475,17.7 D11.1
NetC15_1: C15.1 D13.1 FB2.1 P5.2 | length 12.2
  Top Layer w1: P5.2 17.5,12.5 D13.1 C15.1 FB2.1
NetC17_1: C17.1 Cin1.1 F3.2 U3.13 | length 24.5
  Top Layer w0.254: U3.13 90.55,16.346 90.596,16.3
  Top Layer w1: v4(77.8,20.7) F3.2 ; C17.1 86,12.8 Cin1.1 v4(88.3,14.5) 88.3,16.3 88.9,16.9
  Bottom Layer w1: v4(77.8,20.7) 83.3,20.7 88.3,15.7 v4(88.3,14.5)
NetD4_1: D4.1 K1.4 Q1.1 | length 13.8
  Top Layer w0.8: K1.4 63.535,33.71 ; D4.1 63.725,33.9 63.535,33.71 ; Q1.1 63.535,33.71
NetD6_1: D6.1 R6.2 | length 3
  Top Layer w0.2: R6.2 D6.1
NetD8_1: D8.1 K2.4 Q3.1 | length 19.4
  Top Layer w0.8: Q3.1 55.475,67.325 56.4,66.4 D8.1
  Bottom Layer w0.8: K2.4 54.89,67.91 56.4,66.4 D8.1
NetD9_1: D9.1 R7.2 | length 2.5
  Top Layer w0.254: D9.1 R7.2
NetD10_2: D10.2 Q3.3 R11.2 | length 71.6
  Top Layer w0.8: R11.2 D10.2 38.375,11.9 v2(40.625,11.9) ; v2(40.625,17.4) 44.7,21.475 48.775,21.475 52.3,25 52.3,29.327 54.4,31.427 54.4,62.35 50.55,66.2 Q3.3
  Bottom Layer w0.8: v2(40.625,11.9) v2(40.625,17.4)
NetD12_1: D12.1 R10.2 | length 1.7
  Top Layer w0.3: R10.2 D12.1
NetD14_1: D14.1 R13.2 | length 1.7
  Top Layer w0.3: R13.2 D14.1
NetD15_1: D15.1 R14.2 | length 1.7
  Top Layer w0.3: R14.2 D15.1
NetD16_1: D16.1 R15.2 | length 1.7
  Top Layer w0.3: R15.2 D16.1
NetF1_1: F1.1 REG1.2 | length 9.8
  Top Layer w0.8: F1.1 78.64,9.375 79.4,10.135 79.4,13.8 79,14.2 REG1.2
NetF3_1: F3.1 P6.2 REG2.2 | length 7.9
  Top Layer w1: P6.2 75.65,26.1 77.9,26.1 ; F3.1 77.8,26 77.9,26.1 ; REG2.2 77.9,26.1
NetQ1_2: Q1.2 R3.1 | length 1.5
  Top Layer w0.254: R3.1 Q1.2
NetQ2_2: Q2.2 R5.1 | length 1.5
  Top Layer w0.254: R5.1 Q2.2@68.15,38.675
NetQ3_2: Q3.2 R8.1 | length 1.8
  Top Layer w0.8: Q3.2 R8.1
NetR8_2: R8.2 U2.14 | length 92.1
  Top Layer w0.2: v1(27.5,10.7) 27.5,14 27.95,14.45 U2.14
  Top Layer w0.254: R8.2 57.175,69.225 58,68.4 58,38.8 57.1,37.9 57.1,31 56.3,30.2 56.3,29.7 v1(56.3,28.8) ; v1(56.3,22.2) v1(56.3,27.1)
  Bottom Layer w0.254: v1(27.5,10.7) 28.3,11.5 34.4,11.5 35.3,12.4 35.3,16.042 35.244,16.098 35.244,20.64 36.804,22.2 v1(56.3,22.2) ; v1(56.3,27.1) v1(56.3,28.8)
NetRchg1_2: Rchg1.2 U3.9 | length 3
  Top Layer w0.254: Rchg1.2 88.1,20 88.85,19.25 U3.9
NetRilim1_1: Rilim1.1 U3.12 | length 2.8
  Top Layer w0.254: Rilim1.1 87.3,17.15 87.85,17.15 88.45,17.75 U3.12
NetRiterm1_1: Riterm1.1 U3.15 | length 2.1
  Top Layer w0.254: Riterm1.1 U3.15
NetRpgood1_2: Rpgood1.2 U3.7 | length 7.5
  Top Layer w0.254: Rpgood1.2 85.8,21 86.2,21.4 90.4,21.4 91.05,20.75 U3.7
NetRs1_1: Rs1.1 U3.1 | length 2.8
  Top Layer w0.254: U3.1 94.05,17.75 94.55,17.25 Rs1.1
NetRs1_2: Rs1.2 Rthm1.2 | length 1.3
  Top Layer w0.254: Rthm1.2 Rs1.2
NetRset1_1: Rset1.1 U3.16 | length 2.8
  Top Layer w0.254: U3.16 92.05,16.35 92.325,16.075 92.825,16.075 93,15.9 Rset1.1
NetRtmr1_1: Rtmr1.1 U3.14 | length 3
  Top Layer w0.254: Rtmr1.1 89.9,15.6 90.046,15.746 90.746,15.746 91.05,16.05 U3.14
SENS_TMPE: R9.1 U2.11 | length 9.2
  Top Layer w0.2: R9.1 26.1,22.2 27.2,21.1 27.2,16.2 27.6,15.8 U2.11
SENS_WATER: C16.1 FB2.2 U2.12 | length 14.3
  Top Layer w0.2: 23.45,8.06 25.56,8.06 26.16,8.66 26.16,13.86 27.65,15.35 U2.12
  Top Layer w1: FB2.2 23.45,8.06 C16.1
pads on no net: BLE1.2 BLE1.3 BLE1.4 BLE1.5 BLE1.6 BLE1.8 BLE1.9 BLE1.10 BLE1.11 BLE1.12 BLE1.13 BLE1.17 BLE1.18 BLE1.23 C7.0 C8.0 C9.0 C17.0 F2.0 K1.5 K2.5 Q1.0 Q2.0 Q3.0 REG1.0 REG1.4 REG2.0 REG2.4 U1.4 U2.6 U2.7 U2.10 U2.17 U2.18 U2.19

## Polygon pours and split planes (outlines as drawn)
GND on Top Layer "GND_L01_P006" (solid, remove dead copper, pour order 6): 55.5,0.3 19.7,0.3 2.8,17.2 2.8,17.7 2.8,39.8 3.5,40.5 30.3,40.5 30.4,40.5 33.3,37.6 65.8,37.6 68.4,40.2 68.3,40.3 68.3,44 67.3,45 66.7,45 61,45 60.5,45.5 60.5,50.5 60.5,54.7 60.8,55 89.5,55 89.7,55.2 89.7,76.2 90.1,76.6 99,76.6 99.5,76.1 99.5,14 99,13.5 95.5,13.5 93.8,11.8 92.6,11.8 87.1,6.3 86.6,5.8 86.6,2.1 85,0.5 76.4,0.5 76,0.9 76,4.2 75.8,4.4 74,6.2 74,20.1 73,21.1 57.8,21.1 57.1,20.4 57.1,5.3 56.2,4.4 56.2,1
GND on Bottom Layer "GND_L02_P004" (solid, remove dead copper, pour order 4): 55.5,0.3 19.7,0.3 2.8,17.2 2.8,39.8 3.5,40.5 30.4,40.5 33.3,37.6 65.7,37.6 65.8,37.6 68.3,40.1 68.3,44 67.3,45 63.9,45 62.2,45 61.4,45 61,45 60.8,45.2 60.5,45.5 60.5,54.7 60.8,55 89.5,55 89.7,55.2 89.7,76.2 90.1,76.6 99,76.6 99.5,76.1 99.5,14 99,13.5 95.9,13.5 95.5,13.5 93.8,11.8 92.6,11.8 87.9,7.1 86.6,5.8 86.6,2.1 85,0.5 79.5,0.5 76.4,0.5 76,0.9 76,4.2 75.8,4.4 74,6.2 74,20.1 73,21.1 57.1,21.1 57.1,5.3 56.3,4.5 56.2,4.4 56.2,1

## Keep-outs
Keep-Out Layer:
  lines w0.1: 9.6,40.8 21,40.8 21,41.5 9.6,41.5 9.6,40.8 ; 29.7,41 30.7,41 33.7,38 37.5,38 37.5,39.2 33.7,39.2 30.7,42.2 30.5,42.2 29.7,42.2 29.7,41 ; 59.7,38.3 59.7,39.3 64.9,39.3 64.9,42.9 59.8,42.9 59.8,44 65.8,44 65.8,38.3 59.7,38.3
  lines w0.127: 0,12.052 0,88.1 ccw(c0,100.1) 12,100.1 ; 0.052,12.052 cw(c0.052,0.052) 12.052,0.052 ; 12.052,0 88,0 cw(c100,0) 100,12 100,88.1 cw(c100,100.1) 88,100.1
  lines w0.2: 12,100.1 88,100.1 ; 21.6,81.3 20,81.3 11.7,81.3 11.5,81.5 11.5,82.4 11.7,82.6 20.1,82.6 27.1,82.6 27.1,81.9 ; 10.5,71 20,71 20,71.7 11.1,71.7 10.5,71.7 10.5,71 ; 11.6,76.3 11.6,77.4 11.7,77.5 16.1,77.5 21.8,77.5 25.5,77.5 28.7,77.5 28.7,77 35.7,77 35.7,76.2 27.7,76.2 25.4,76.2 24.7,76.9 22.3,76.9 21.6,76.2 11.7,76.2 11.6,76.3 ; 11.7,59.4 11.7,60.4 11.8,60.5 17,60.5 17,59.3 11.8,59.3 11.7,59.4 ; 11.8,64.4 11.8,65.4 11.9,65.5 16.8,65.5 16.8,64.3 11.9,64.3 11.8,64.4 ; 24,45.6 25.3,45.6 25.3,70.1 25.2,70.2 24,70.2 24,45.6 ; 27,94.6 27,96 34.7,96 34.7,94.6 27,94.6 ; 37.5,80.8 37.5,91 38.8,91 38.8,80.8 37.5,80.8 ; 41.4,81.5 41.4,86 42.4,86 42.4,81.5 41.4,81.5 ; 48.7,86.2 55.7,86.2 55.7,86.8 48.7,86.8 48.7,86.2 ; 62.9,58.2 62.9,61.9 85.7,61.9 86.4,61.9 86.4,80.7 89.3,80.7 89.3,77.5 89.3,59.5 88,58.2 62.9,58.2 ; 67.7,68.1 67.7,69.4 79.5,69.4 79.5,68.1 67.7,68.1
  lines w0.254: 21.6,81.3 22.2,81.9 23.7,81.9 27.1,81.9 ; 44.4,70.8 44.4,71.8 57.1,71.8 57.1,70.8 45.7,70.8 44.4,70.8

## Other copper
Top Layer:
  rectangle net NetC17_1: 88.8,16.225 90.675,17.375
  rectangle net +5: 88.5,18.1 90.1,18.9
  rectangle net NetBAT1_1: 92.4,18.1 95.5,18.9

## Silkscreen, mask and mechanical layers (free items; w line width, h text height)
Top Overlay:
  text "E350CA" at 21.1,94.6 h1.2
  text "NTC 10D-11" at 39.1,92.8 h1.5
  text "X2电容" at 49.8,91.1 h1.5 r90
  text "1MΩ 1W" at 57.7,89.6 h1.2 r90
  text "电源" at 12.2,88.5 h4
  text "E350CA" at 32.6,88 h1.2 r270
  text "零线(N)" at 1.6,83.577 h3
  text "E350CA" at 38.8,82.7 h1.2 r270
  text "地线(E)" at 1.6,78.35 h3
  text "250V Y2 Cap" at 52.4,75.6 h1.2
  text "250V Y2 Cap" at 41.6,75.4 h1.2 r90
  text "火线(L)" at 2,73.4 h3
  text "零线(N)" at 1.86,66.5 h3
  text "地线(E)" at 1.7,61.4 h3
  text "火线(L)" at 1.63,56.4 h3
  text "加热器" at 9.5,50.9 h4
  text "水阀地线 / 备用" at 1,43.5 h3
  text "水阀" at 9.7,42.3 h4
  text "负极" at 3.054,37.9 h3
  text "(GND)" at 2.453,35.7 h2.5
  text "地线(E)" at 1.2,31.481 h3
  text "正极" at 3.027,27.1 h3
  text "(+12V)" at 1.638,24.6 h3
  text "B_Tx" at 51.8,20.4 h1
  text "B_Rx" at 54.5,20.4 h1
  text "温度(红)" at 0.7,19.8 h3
  text "水位(黄)" at 0.707,15.173 h3
  text "传感" at 4.1,11.7 h3.5
  text "TX1" at 29.712,7.2 h1
  text "RX1" at 32.227,7.2 h1
  text "↑12V常通 / （备用）" at 11.4,4.2 h2.2
  text "RST" at 24.525,3.1 h1
  text "MOSI" at 26.845,3.1 h1
  text "MISO" at 29.365,3.089 h1
  text "SCK" at 32.097,3.1 h1
  text "GND" at 37.129,3.1 h1
  text "GND" at 39.654,3.1 h1
  text "5V" at 34.736,2.924 h1
  text "绿" at 22.4,2.8 h1
  text "红" at 39.2,1.4 h1
Bottom Overlay:
  circle w0.254: c93.918,58.173 r1.909
  lines w0.254: 92.718,56.873 95.218,59.373
  text "JLCJLCJLCJLC" at 80.1,97.2 h1.2
  text "XZ @ CQUPT Ver 4" at 98.5,69.2 h3.2 r90
  text "Pb" at 94.818,59.473 h3 r90
  text "太阳能热水器控制器" at 95.2,55.4 h3.2 r90
  text "2017-09-27" at 99,39.2 h3.2 r90
  text "\"P6\" 用于 / 当AC/DC模块 / 为5V输出时使用 / 此时不焊接12V转5V的REG2" at 80.2,28.5 h1 r90
  text "Ver4 较之前的版本 / 改进了交流输入端附近器件的布局 / 拓宽了交流电器件的距离 / 增加了隔离槽 / 改进了AC/DC模块的线径和走线 / 拓宽了两个LED的距离 / 改进了传感器测量电路 / 其他细小改进" at 69.5,17.4 h1 r90
Bottom Paste:
  lines w2: 14,27.3 18.55,27.3
Bottom Solder:
  lines w2: 14.3,57.42 19.23,57.42 22.1,60.29 ; 18.65,42.8 18.65,43.1 22.1,46.55 22.1,60.29 ; 22.1,67.91 22.1,60.29 ; 23.5,74.4 23.5,75.6 ; 27.18,60.29 27.18,51.72 32.35,46.55 32.35,42.8 34.9,42.8 35.067,42.634 35.067,41 ; 49.405,51.2 49.405,42.395 50.8,41 63.134,41
  lines w3: 14.3,67.42 10.88,67.42 8.2,70.1 8.2,82.5 10.1,84.4 14.3,84.4 ; 14.3,74.4 27,74.4 27.18,74.22 27.18,67.91 ; 27.18,60.29 27.18,67.91 ; 27.2,67.93 27.18,67.91 ; 23.5,74.4 23.5,74.4

## Text inside footprints (layer, text, board x,y; h text height)
BLE1: Top Overlay "JDY-08" at 65.563,13.644 h1 r270